# Altium PCB DB10005_BMS.PcbDoc
Units mm, origin at the board's own origin, x right, y up, seen from the top; angles counter-clockwise.
Board outline 140.01 x 60 mm, 4 copper layers (L1, L2, L3, L4), stack 1.446 mm thick; 56 components, 94 nets, 432 pads, 0 vias.
Unrouted connection lines stored in the file: 218.
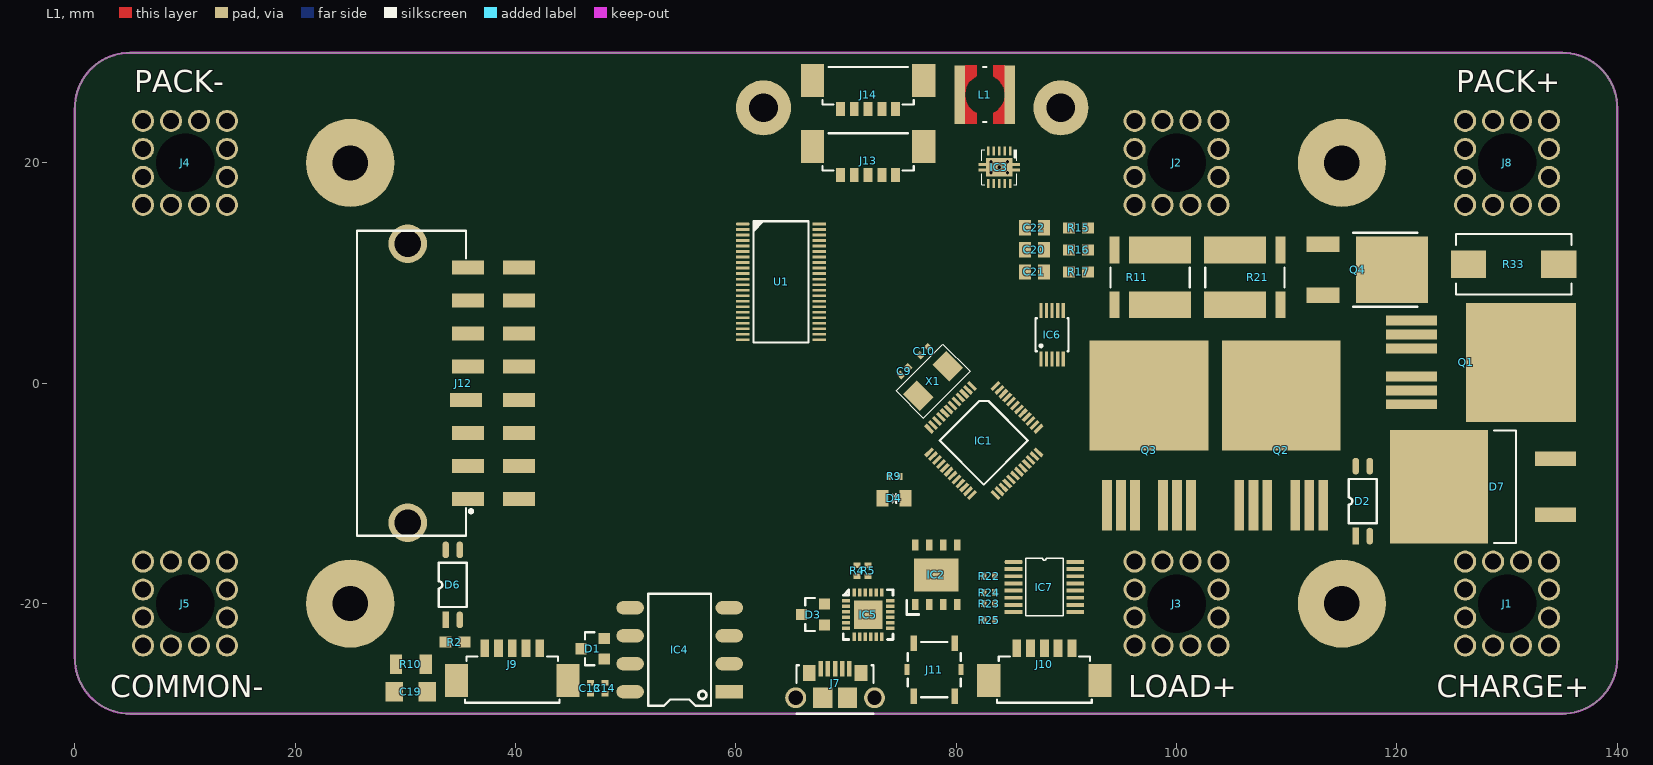
[diagram p0: L1 view]
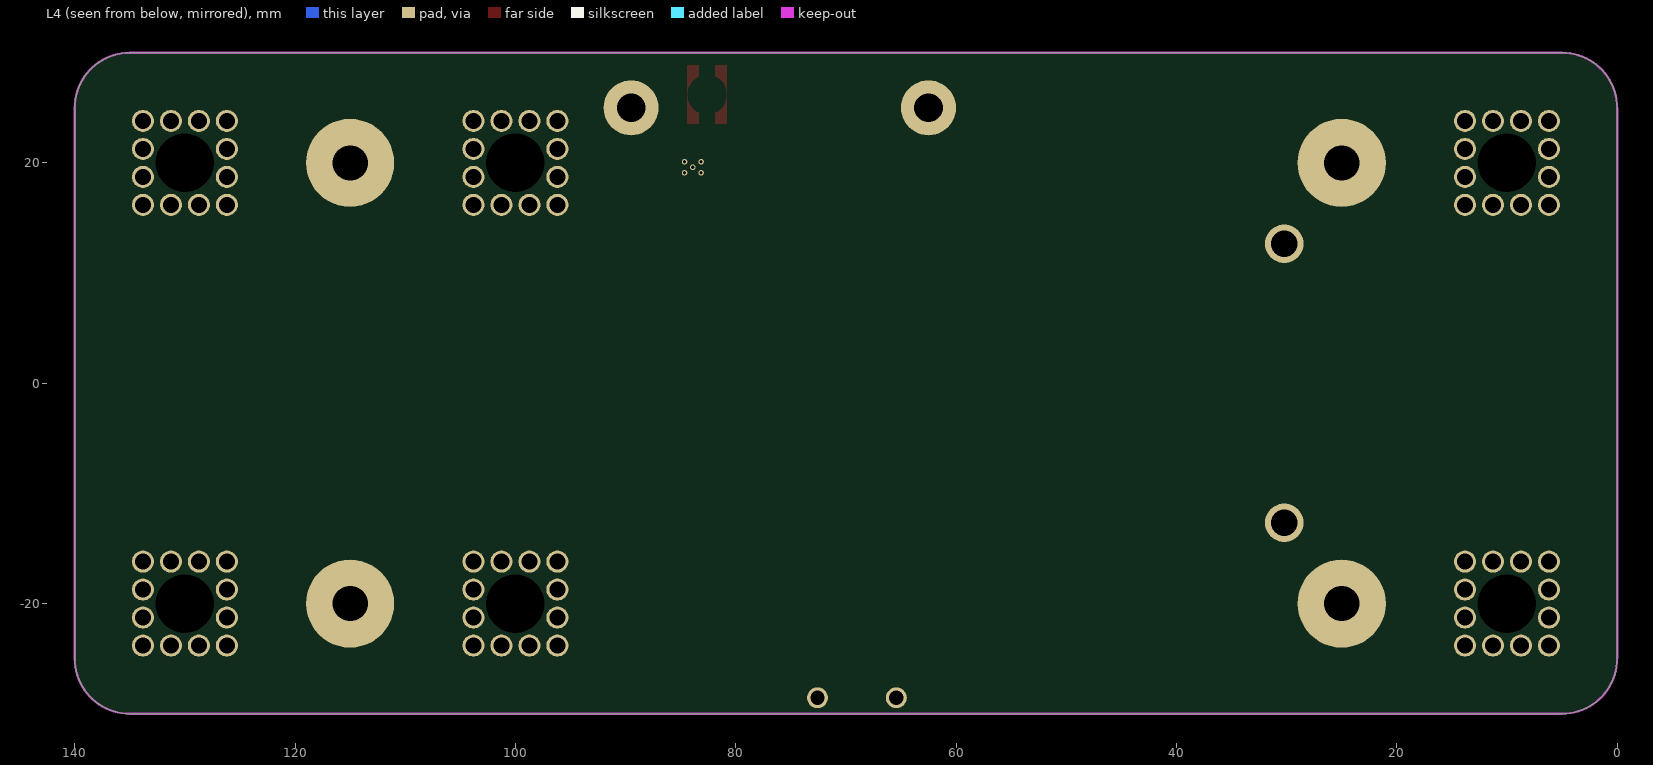
[diagram p1: L4 view, seen from below]

## Layer stack, top to bottom
Top Solder: solder mask 0.05, Solder Resist, Dk 3.5
L1: signal copper 0.035
Dielectric 1: prepreg 0.288, FR-4, Dk 4.2
L2: signal copper 0.035
Dielectric 3: core 0.73, FR-4, Dk 4.2
L3: signal copper 0.035
Dielectric 2: prepreg 0.288, FR-4, Dk 4.2
L4: signal copper 0.035
Bottom Solder: solder mask 0.05, Solder Resist, Dk 3.5

## Board outline
0,-25 ccw(c5,-25) 5,-30 135,-30 ccw(c135,-25) 140,-25 140,25 ccw(c135,25) 135,30 5,30 ccw(c5,25) 0,25 -0.014,24.986

## Design rules (kind name [scope] priority, off if disabled: settings)
Clearance [All] p1: gap=0.254
PolygonConnect [All] p1: connectstyle=Relief reliefconductorwidth=0.254 reliefentries=4 polygonreliefangle="90 Angle" airgapwidth=0.254
RoutingVias [All] p1: holewidth=0.711 width=1.27 viastyle="Through Hole" minholewidth=0.711 minwidth=1.27 maxholewidth=0.711 maxwidth=1.27
SolderMaskExpansion [All] p1: expansion=0.102
Width [All] p1: maxlimit=0.254 minlimit=0.254 preferedwidth=0.254
30 further rules are at their usual default settings.

## Classes and differential pairs
component class "Battery stack monitor": U1
component class "USB - Serial": D3 IC5 R4 R5
component class PowerSwitch: C20 C21 C22 D2 D7 IC6 IC7 Q1 Q2 Q3 Q4 R11 R15 R16 R17 R21 R22 R23 R24 R25 R33
component class "Power management": IC3 L1
component class DB10005_TopLevel: D4 J1 J2 J3 J4 J5 J7 J8 J9 J10 J11 J12 J13 J14 R9
component class Controller: C9 C10 IC1 IC2 X1
component class CAN: C13 C14 C19 D1 D6 IC4 R2 R10

## Components (designator, comment, footprint, x,y, rotation, side; value= is the part's Value field where it differs from the comment)
C9 "18pF" C0402 75.3,1.1 r225 top
C10 "18pF" C0402 77.1,2.9 r45 top
C13 "1uF" C0402 46.8,-27.7 r270 top
C14 "100nF" C0402 48.099,-27.7 r270 top
C19 "10nF" C-1206 30.5,-28 r0 top
C20 "100nF" C-0805 87.1,12.1 r0 top
C21 "100nF" C-0805 87.1,10.1 r0 top
C22 "100nF" C-0805 87.1,14.1 r0 top
D1 "ESDA6V1L" SOT23 47,-24.1 r90 top
D2 "HMHA2801" FSOP4 116.9,-10.7 r90 top
D3 "SP0502BAHTG" SOT23 67,-21 r90 top
D4 "Green" D-0805 74.352,-10.45 r0 top
D6 "HMHA2801" FSOP4 34.3,-18.3 r90 top
D7 "STPS41H100CG" D2-PAK 127.8,-9.4 r90 top
IC1 "STM32F303CCT6" LQFP48 82.5,-5.2 r315 top
IC2 "M25P16" VFQFPN 78.2,-17.4 r0 top
IC3 "LM5165YDRCT" PWSON10 83.9,19.6 r180 top
IC4 "ISO1050DUBR" PDSO8 59.4,-28 r180 top
IC5 "CP2104-F03-GM" QFN24 72,-21 r0 top
IC6 "ISL28022" MSOP10 88.7,4.4 r90 top
IC7 "BQ76200PW" TSSOP16 88,-18.5 r0 top
J1 "M5 Bush" "7460408_HAL Surface" 130,-20 r0 top
J2 "M5 Bush" "7460408_HAL Surface" 100,20 r0 top
J3 "M5 Bush" "7460408_HAL Surface" 100,-20 r0 top
J4 "M5 Bush" "7460408_HAL Surface" 10,20 r0 top
J5 "M5 Bush" "7460408_HAL Surface" 10,-20 r0 top
J7 "USB3075" "USB3075 - NOSLOT" 69,-30 r0 top
J8 "M5 Bush" "7460408_HAL Surface" 130,20 r0 top
J9 "53261-0571" 53261-0571 39.7,-27 r0 top
J10 "53261-0571" 53261-0571 88,-27 r0 top
J11 "EVQPLMA15" EVQPLM 78,-26 r180 top
J12 "662016230822" 662016230822 38,0 r270 top
J13 "53398-0571" 53398-0571 72,21.5 r180 top
J14 "53398-0571" 53398-0571 72,27.5 r180 top
L1 "150uH 0.42A" "WE-TPC 4828, MH" 82.6,26.2 r180 top
Q1 "IRF2907ZS" D2PAK7 127.5,1.9 r270 top
Q2 "IRF2907ZS" D2PAK7 109.5,-4.9 r0 top
Q3 "IRF2907ZS" D2PAK7 97.5,-4.9 r0 top
Q4 "IRFR6215" D-PAK 113.3,12.6 r270 top
R2 "2.2K" 0603 34.5,-23.5 r0 top
R4 "240" 0402 71,-17 r270 top
R5 "240" 0402 72,-17 r270 top
R9 "470" 0402 74.352,-8.45 r0 top
R10 "1M" 1206 30.5,-25.5 r0 top
R11 "0.5mOhm" WSLP2726 97.6,9.6 r180 top
R15 "10R" 0603 91.1,14.1 r0 top
R16 "10R" 0603 91.1,12.1 r0 top
R17 "10R" 0603 91.1,10.1 r0 top
R21 "0.5mOhm" WSLP2726 106.2,9.6 r0 top
R22 "10k" 0402 83,-17.5 r0 top
R23 "10k" 0402 83,-20 r0 top
R24 "10k" 0402 83,-19 r0 top
R25 "10k" 0402 83,-21.5 r0 top
R33 "18R" SM_3 130.6,10.8 r0 top
U1 "LTC6802-1" SSOP44 64.1,9.2 r0 top
X1 "8MHz" XTAL150SMD_125X196 77.9,0.2 r45 top

## Footprints (in the part's own frame and the unit in brackets; to place one, negate y for a bottom-side part, rotate by r counter-clockwise, add the part's x,y. Pads: shape width x height; smd on the part's side, far side on the other; paste and mask are expansions set on the pad)
0402 [mm]
  rect 0.5x0.635 smd: 1(-0.5,0) 2(0.5,0)
  body extent -0.5,-0.25 0.5,0.25, height 0.25
0603 [mm]
  rect 1.1x1 smd: 1(-0.85,0) 2(0.85,0)
  body extent -0.95,-0.45 0.95,0.45, height 0.45
1206 [mm]
  rect 1.1x1.8 smd: 1(-1.35,0) 2(1.35,0)
  body extent -1.55,-0.78 1.55,0.78, height 0.6
53261-0571 [mm]
  rect 2.1x3 smd: 0(-5.05,0) 0(5.05,0)
  rect 0.8x1.6 smd: 1(-2.5,2.95) 2(-1.25,2.95) 3(0,2.95) 4(1.25,2.95) 5(2.5,2.95)
  silkscreen extent -4.3,-2 4.3,2.2, body extent -5.7,-2 5.7,3.2, height 3.41
53398-0571 [mm]
  rect 2.1x3 smd: 0(-5.05,0) 0(5.05,0)
  rect 0.8x1.3 smd: 1(-2.5,2.6) 2(-1.25,2.6) 3(0,2.6) 4(1.25,2.6) 5(2.5,2.6)
  silkscreen extent -4.15,-1.2 4.15,2.2, body extent -5.7,-1.15 5.7,3.05, height 4.71
"7460408_HAL Surface" [mm] "M5, thr 6mm"
  round 2 hole 1.45: 1(-3.81,-3.81) 1(-3.81,-1.27) 1(-3.81,1.27) 1(-3.81,3.81) 1(-1.27,-3.81) 1(-1.27,3.81) 1(1.27,-3.81) 1(1.27,3.81) 1(3.81,-3.81) 1(3.81,-1.27) 1(3.81,1.27) 1(3.81,3.81)
  round 0 hole 5.3 unplated: ""(0,0)
  body extent -4.5,-4.5 4.5,4.5, height 6
662016230822 [mm] "Dual row SMT Right angle header With TH Metal Clip 16p"
  rect 1.27x2.92 smd: 1(10.5,-2.31) 2(7.5,-2.31) 3(4.5,-2.31) 4(1.5,-2.49) 5(-1.5,-2.31) 6(-4.5,-2.31) 7(-7.5,-2.31) 8(-10.5,-2.31) 9(10.5,2.31) 10(7.5,2.31) 11(4.5,2.31) 12(1.5,2.31) 13(-1.5,2.31) 14(-4.5,2.31) 15(-7.5,2.31) 16(-10.5,2.31)
  round 3.5 hole 2.41: ""(-12.66,-7.79) ""(12.66,-7.79)
  silkscreen extent -13.85,-12.39 13.85,-1.9, body extent -13.85,-12.39 13.85,3.51, height 8.83
C0402 [mm]
  rect 0.5x0.635 smd: 1(-0.5,0) 2(0.5,0)
  body extent -0.5,-0.25 0.5,0.25, height 0.5
C-0805 [mm]
  rect 1.1x1.4 smd: 1(-0.875,0) 2(0.875,0)
  body extent -1.01,-0.64 1.01,0.64, height 0.6
C-1206 [mm]
  rect 1.6x1.8 smd: 1(-1.5,0) 2(1.5,0)
  body extent -1.61,-0.81 1.61,0.81, height 0.45
D2-PAK [mm]
  rect 1.3x3.7 smd: A1(-2.54,-6.6) A2(2.54,-6.6)
  rect 10.3x8.9 smd: K(0,4)
  silkscreen extent -5.1,-3 5.1,-1, body extent -5.08,-7.82 5.08,7.45, height 4.88
D2PAK7 [mm]
  rect 10.8x10 smd: D(0,3.775)
  rect 0.9x4.6 smd: G(-3.81,-6.175) S(-2.537,-6.175) S(-1.27,-6.175) S(1.27,-6.175) S(2.54,-6.175) S(3.81,-6.175)
  body extent -5,-7.8 5,7.87, height 4.81
D-0805 [mm]
  rect 1.1x1.5 smd: A(-1.05,0) K(1.05,0)
  silkscreen extent -0.15,-0.4 0.2,0.4, body extent -1.01,-0.64 1.01,0.64, height 0.6
D-PAK [mm]
  rect 6x6.5 smd: D(2.3,6.25)
  rect 1.4x3 smd: G(0,0) S(4.6,0)
  silkscreen extent -1.06,2.74 5.67,8.54, body extent -0.99,-0.75 5.59,8.95, height 2.47
EVQPLM [mm] "Tactile switch"
  rect 0.45x1 smd: 0(-2.45,0) 0(2.45,0)
  rect 0.6x1.4 smd: 1(-1.85,2.4) 1(-1.85,-2.4) 2(1.85,2.4) 2(1.85,-2.4)
  silkscreen extent -2.4,-2.5 2.4,2.5, body extent -2.45,-2.5 2.45,2.5, height 1.5
FSOP4 [mm]
  rect 1.52x0.61 smd: 1(-3.175,0.635)
  oval 1.52x0.61 smd: 2(-3.175,-0.635) 3(3.175,-0.635) 4(3.175,0.635)
  silkscreen extent -2,-1.27 2,1.27, body extent -3.5,-1.4 3.5,1.4, height 2.1
LQFP48 [mm]
  rect 1x0.32 smd: 1(-4.26,2.75) 2(-4.26,2.25) 3(-4.26,1.75) 4(-4.26,1.25) 5(-4.26,0.75) 6(-4.26,0.25) 7(-4.26,-0.25) 8(-4.26,-0.75) 9(-4.26,-1.25) 10(-4.26,-1.75) 11(-4.26,-2.25) 12(-4.26,-2.75) 25(4.26,-2.75) 26(4.26,-2.25) 27(4.26,-1.75) 28(4.26,-1.25) 29(4.26,-0.75) 30(4.26,-0.25) 31(4.26,0.25) 32(4.26,0.75) 33(4.26,1.25) 34(4.26,1.75) 35(4.26,2.25) 36(4.26,2.75)
  rect 0.32x1 smd: 13(-2.75,-4.26) 14(-2.25,-4.26) 15(-1.75,-4.26) 16(-1.25,-4.26) 17(-0.75,-4.26) 18(-0.25,-4.26) 19(0.25,-4.26) 20(0.75,-4.26) 21(1.25,-4.26) 22(1.75,-4.26) 23(2.25,-4.26) 24(2.75,-4.26) 37(2.75,4.26) 38(2.25,4.26) 39(1.75,4.26) 40(1.25,4.26) 41(0.75,4.26) 42(0.25,4.26) 43(-0.25,4.26) 44(-0.75,4.26) 45(-1.25,4.26) 46(-1.75,4.26) 47(-2.25,4.26) 48(-2.75,4.26)
  silkscreen extent -2.83,-2.83 2.83,2.83, body extent -4.5,-4.5 4.5,4.5, height 1.52
MSOP10 [mm] "Mini small outline package"
  rect 1.4x0.3 smd: 1(-2.2,1) 2(-2.2,0.5) 3(-2.2,0) 4(-2.2,-0.5) 5(-2.2,-1) 6(2.2,-1) 7(2.2,-0.5) 8(2.2,0) 9(2.2,0.5) 10(2.2,1)
  silkscreen extent -1.5,-1.5 1.5,1.5, body extent -2.45,-1.5 2.45,1.5, height 1.15
PDSO8 [mm]
  rect 2.5x1.2 smd: 1(0,0)
  oval 2.5x1.2 smd: 2(0,-2.54) 3(0,-5.08) 4(0,-7.62) 5(9,-7.62) 6(9,-5.08) 7(9,-2.54) 8(9,0)
  silkscreen extent 1.65,-8.89 7.35,1.27, body extent -0.45,-8.7 9.45,1.2, height 4.33
PWSON10 [mm]
  rrect40% 0.23x0.8 smd: 1(-1,-1.475) 2(-0.5,-1.475) 3(0,-1.475) 4(0.5,-1.475) 5(1,-1.475) 6(1,1.475) 7(0.5,1.475) 8(0,1.475) 9(-0.5,1.475) 10(-1,1.475)
  rrect40% 1.05x0.68 on Top Paste: 2(-0.575,0.4) 2(-0.575,-0.4) 2(0.575,0.4) 2(0.575,-0.4)
  rrect10% 0.5x0.26 on Top Paste: 3(-1.55,0.25) 3(1.55,0.25) 4(-1.55,-0.25) 4(1.55,-0.25)
  rect 0.7x0.28 smd paste-2: CP(-1.55,-0.25) CP(-1.55,0.25) CP(1.55,-0.25) CP(1.55,0.25)
  round 0.5 hole 0.3 unplated mask+0.102: CP(-0.75,0.5) CP(-0.75,-0.5) CP(0,0) CP(0.75,0.5) CP(0.75,-0.5)
  rect 2.4x1.65 smd paste-2: CP(0,0)
  silkscreen extent -1.6,-1.6 1.6,1.6, body extent -1.6,-1.6 1.6,1.6, height 0.6
QFN24 [mm]
  rect 2.6x2.6 smd paste-10: 0(0,0)
  rect 0.75x0.3 smd: 1(-2,1.25) 2(-2,0.75) 3(-2,0.25) 4(-2,-0.25) 5(-2,-0.75) 6(-2,-1.25) 13(2,-1.25) 14(2,-0.75) 15(2,-0.25) 16(2,0.25) 17(2,0.75) 18(2,1.25)
  rect 0.3x0.75 smd: 7(-1.25,-2) 8(-0.75,-2) 9(-0.25,-2) 10(0.25,-2) 11(0.75,-2) 12(1.25,-2) 19(1.25,2) 20(0.75,2) 21(0.25,2) 22(-0.25,2) 23(-0.75,2) 24(-1.25,2)
  silkscreen extent -2.25,-2.25 2.25,2.25, body extent -2.01,-2.01 2.01,2.01, height 0.9
SM_3 [mm]
  rect 3.2x2.5 smd: 1(-4.1,0) 2(4.1,0)
  silkscreen extent -5.25,-2.75 5.25,2.75, body extent -5.4,-2.75 5.4,2.75, height 5.05
SOT23 [mm]
  rect 1x1 smd: A(0,1.05) K1(-0.95,-1.05) K2(0.95,-1.05)
  silkscreen extent -1.5,-0.15 1.5,0.7, body extent -1.5,-1.29 1.5,1.35, height 1.08
SSOP44 [mm]
  oval 1.25x0.25 smd: 1(-3.475,5.25)
  rect 1.25x0.25 smd: 2(-3.475,4.75) 3(-3.475,4.25) 4(-3.475,3.75) 5(-3.475,3.25) 6(-3.475,2.75) 7(-3.475,2.25) 8(-3.475,1.75) 9(-3.475,1.25) 10(-3.475,0.75) 11(-3.475,0.25) 12(-3.475,-0.25) 13(-3.475,-0.75) 14(-3.475,-1.25) 15(-3.475,-1.75) 16(-3.475,-2.25) 17(-3.475,-2.75) 18(-3.475,-3.25) 19(-3.475,-3.75) 20(-3.475,-4.25) 21(-3.475,-4.75) 22(-3.475,-5.25) 23(3.475,-5.25) 24(3.475,-4.75) 25(3.475,-4.25) 26(3.475,-3.75) 27(3.475,-3.25) 28(3.475,-2.75) 29(3.475,-2.25) 30(3.475,-1.75) 31(3.475,-1.25) 32(3.475,-0.75) 33(3.475,-0.25) 34(3.475,0.25) 35(3.475,0.75) 36(3.475,1.25) 37(3.475,1.75) 38(3.475,2.25) 39(3.475,2.75) 40(3.475,3.25) 41(3.475,3.75) 42(3.475,4.25) 43(3.475,4.75) 44(3.475,5.25)
  silkscreen extent -2.5,-5.5 2.5,5.5, body extent -3.76,-5.6 3.76,5.6, height 1.09
TSSOP16 [mm]
  rrect50% 1.6x0.35 smd: 1(-2.8,2.275)
  rect 1.6x0.35 smd: 2(-2.8,1.625) 3(-2.8,0.975) 4(-2.8,0.325) 5(-2.8,-0.325) 6(-2.8,-0.975) 7(-2.8,-1.625) 8(-2.8,-2.275) 9(2.8,-2.275) 10(2.8,-1.625) 11(2.8,-0.975) 12(2.8,-0.325) 13(2.8,0.325) 14(2.8,0.975) 15(2.8,1.625) 16(2.8,2.275)
  silkscreen extent -1.7,-2.6 1.7,2.6, body extent -3.14,-2.5 3.14,2.5, height 1.09
"USB3075 - NOSLOT" [mm]
  round 1.9 hole 1.3: 0(-3.575,1.45) 0(3.575,1.45)
  rect 1.15x1.45 smd: 0(-2.35,3.68) 0(2.35,3.68)
  rect 1.75x1.9 smd: 0(-1.125,1.45) 0(1.125,1.45)
  rect 0.4x1.4 smd: 1(-1.3,4.1) 2(-0.65,4.1) 3(0,4.1) 4(0.65,4.1) 5(1.3,4.1)
  silkscreen extent -3.5,0 3.5,4.4, body extent -3.89,-1.2 3.89,4.29, height 2.59
VFQFPN [mm]
  rect 4.04x2.99 smd paste-10: 0(0,0)
  rect 0.6x1 smd: 1(-1.905,-2.7) 2(-0.635,-2.7) 3(0.635,-2.7) 4(1.905,-2.7) 5(1.905,2.7) 6(0.635,2.7) 7(-0.635,2.7) 8(-1.905,2.7)
  silkscreen extent -2.7,-3.6 -1.6,-2.3, body extent -2.5,-3 2.5,3, height 0.85
"WE-TPC 4828, MH" [mm] "SMD Inductor, 2-Leads, Body 4,8x4,8mm"
  rect 0.95x5.3 smd: 1(-2.275,0) 2(2.275,0)
  L1 region: -1.8,-2.65 -0.75,-2.65 -0.75,-1.65 -1,-1.5 -1.2,-1.35 -1.35,-1.2 -1.5,-1 -1.65,-0.7 -1.7,-0.6 -1.75,-0.4 -1.8,0
  L1 region: 1.8,-2.65 0.75,-2.65 0.75,-1.65 1,-1.5 1.2,-1.35 1.45,-1.1 1.55,-0.95 1.7,-0.65 1.75,-0.45 1.8,0
  L1 region: 1.8,2.65 0.75,2.65 0.75,1.65 0.95,1.55 1.1,1.45 1.45,1.1 1.6,0.85 1.65,0.75 1.75,0.45 1.8,0
  L1 region: -1.8,2.65 -0.75,2.65 -0.75,1.65 -0.85,1.6 -1.1,1.45 -1.4,1.15 -1.55,0.95 -1.7,0.65 -1.75,0.45 -1.8,0
  silkscreen extent -0.15,-2.5 0.15,2.5, body extent -2.4,-2.4 2.4,2.4, height 2.79
WSLP2726 [mm] "Shunt resistor"
  rect 5.6x2.44 smd: I1(-0.89,-2.48) I2(-0.89,2.48)
  rect 0.89x2.44 smd: U1(3.245,-2.48) U2(3.245,2.48)
  silkscreen extent -3.6,-0.9 3.6,0.9, body extent -3,-3.45 3.6,3.45, height 2.96
XTAL150SMD_125X196 [mil] "XTAL150SMD_125X196"
  rect 70x85 smd mask+2: 1(-74.8,0) 2(74.8,0)
  silkscreen extent -118,-69 118,69, body extent -120,-69 120,69, height 57

## Part data
C9 C10: library part 18pF/0402/CER/50V, "Capacitor, 18pF, 50V, NP0"
C13: library part 1uF/0402/CER/6.3V, "Capacitor, 1uF, 6.3V, X5R"
C14: library part 100nF/0402/CER/25V, "Capacitor, 100nF, 25V, X7R"
C19: library part 10nF/1206/CER/1kV, "Capacitor, F, 1kV, X7R"
C20 C21 C22: library part 100nF/0805/CER/100V, "Capacitor, 100nF, 100V, X7R"
D1: "Diode TVS Dual, Vrwm: 5.25V, Vbr: 7.2V, Vc: 12.45V, Ippm: 15A"
D2 D6: "Optocoupler, Vout:80V, Iin:0.01A"
D3: "Diode TVS Dual, Vrwm: 5.5V Vc: 8V"
D4: library part SML-210PTT86L, "Led, Green, Li:4mcd, Vf:2.2V, If:0.02A"
D7: "100 V, 40 A, TO-263, 3 Pins, 900 mV"
IC1: "MCU, 32BIT CORTEX-M3, 72MHz"
IC2: library part M25P16-VMP6G, "FLASH, SERIAL, 16MB"
IC3: library part LM5165Y, "Buck Vreg 150mA 3V3 out 5-65Vin"
IC4: "CAN TRANSCEIVER"
IC5: "USB to UART converter"
IC6: "Current and voltage ADC"
IC7: "Battery protector, Lead Acid"
J1 J2 J3 J4 J5 J8: library part 7460408, "Bush with Circumference M5"
J7: "USB 2.0 MICRO B, RCPT, 5POS, SMT"
J9 J10: "PicoBlade 53261 Series, 5Pin, Right Angle"
J11: "SWITCH, TACT, 4.9MM, SMD, 2.6N"
J12: "WR-MPC3 Series, Surface Mount, Header, 16 Contacts, 3 mm"
J13 J14: "PicoBlade 53398 Series, 5Pin, Right Angle"
L1: library part 744043151, "150UH, 30%, 0.42A"
Q1 Q2 Q3: library part IRF2907ZS-7PPBF, "Mosfet, N-channel, Vds:75V, Id:180A, Vgs-th:4V, Rds-on:0.0038ohm"
Q4: library part IRFR6215TRPBF, "Mosfet, P-channel, Vds:150V, Id:13A, Vgs-th:4V, Rds-on:0.295ohm"
R2: library part 2.2K/0603/0063W/50V, "Resistor, 2.2K, 1%, 0.063W, 50V, 100PPM, 0603"
R4 R5: library part 240/0402/0063W/50V, "Resistor, 240, 0.1%, 0.0625W, 50V, 100PPM, 0402"
R9: library part 470/0402/0063W/50V, "Resistor, 470, 1%, 0.0625W, 50V, 100PPM, 0402"
R10: library part 1M/1206/0300W/1kV, "Resistor, 1M, 1%, 0.25W, 1kV, 200PPM, 1206"
R11 R21: library part WSLP2726L5000FEA, "0.5mohm, 7 W, ± 1%, 2726"
R15 R16 R17: library part 10/0603/0063W/50V, "Resistor, 10R, 1%, 0.063W, 50V, 200PPM, 0603"
R22 R23 R24 R25: library part 10k/0402/0063W/50V, "Resistor, 10k, 0.1%, 0.0625W, 50V, 100PPM, 0402"
R33: library part 18, "Resistor Wirewound, 18R, 5%, 1W, 500V, 200PPM, SMW"
U1: library part LTC6802IG-1, "Multicell Battery Stack Monitor, T:-40°C to +85°C"
X1: library part 7A-8.000MAAJ-T, "8MHZ, 18PF, 5 X 3.2MM"

## Free pads (board coordinates)
  round 8 hole 3.2 unplated: 1(25,20) 2(25,-20) 3(115,20) 5(115,-20)
  round 5 hole 2.6 unplated: 6(62.5,25) 7(89.5,25)

## Nets (pads, with @x,y where several pads share a name; then routed paths per layer and width w, separated by ;. In a path a pad name is that pad's centre, name@x,y a point inside that pad or via, vN(x,y) a via of type N, cw(c..) or ccw(c..) an arc to the next point about the centre after c; other vN are vias at no path point)
3V3: IC1.9 IC1.24 IC1.36 IC1.48 IC2.3 IC2.7 IC2.8 IC4.1 J10.1 J11.2 J13.1 J14.1
5V_CAN: C13.2 C14.2 IC4.8 J9.2
+3V3: IC6.6
BATT+: J2.1 R11.I1 R15.2 R21.I2
CANH: D1.K1 IC4.7 J9.3
CANL: D1.K2 IC4.6 J9.4
ENABLE_CAN: J9.1 R2.2
GND: C9.1 C10.1 C19.1 C20.1 C21.1 C22.1 D3.A D4.K D6.3 IC1.8 IC1.23 IC1.35 IC1.47 IC2.0 IC2.4 IC3.3@83.9,21.075 IC3.10 IC3.CP IC4.4 IC5.0 IC5.2 IC6.1 IC6.2 IC6.7 IC7.9 J4.1 J5.1 J7.0 J7.5 J10.0 J10.5 J11.0 J13.0 J13.5 J14.0 J14.5 pad.6 R10.1
GND_CAN: C13.1 C14.1 C19.2 D1.A D6.2 IC4.5 J9.0 J9.5 R10.2
LED: J14.4
NetC9_2: C9.2 IC1.6 X1.1
NetC10_2: C10.2 IC1.5 X1.2
NetC16_2: IC5.16
NetC17_2: IC5.7 IC5.8 J7.1
NetC20_2: C20.2 IC6.10 R16.1
NetC21_2: C21.2 IC6.9 pad.7 R17.1
NetC22_2: C22.2 IC6.8 R15.1
NetC23_2: IC7.2
NetC24_2: IC7.11
NetD2_1: D2.1
NetD2_2: D2.2 D2.4 Q1.S Q2.D Q3.D Q4.S R11.I2 R21.I1
NetD2_3: D2.3 IC1.10
NetD3_K1: D3.K1 IC5.4 J7.2
NetD3_K2: D3.K2 IC5.3 J7.3
NetD4_A: D4.A R9.1
NetD6_1: D6.1 R2.1
NetD6_4: D6.4 IC1.38
NetD7_A1: D7.A1 D7.A2 Q1.D
NetD7_K: D7.K J1.1
NetIC1_2: IC1.2 R22.1
NetIC1_3: IC1.3 R25.1
NetIC1_4: IC1.4 R24.1
NetIC1_11: IC1.11
NetIC1_12: IC1.12 R5.1
NetIC1_13: IC1.13 R4.1
NetIC1_14: IC1.14
NetIC1_15: IC1.15
NetIC1_16: IC1.16
NetIC1_17: IC1.17
NetIC1_19: IC1.19 R9.2
NetIC1_29: IC1.29 IC6.3
NetIC1_30: IC1.30 IC6.5
NetIC1_31: IC1.31 IC6.4
NetIC1_32: IC1.32 IC4.2
NetIC1_33: IC1.33 IC4.3
NetIC1_34: IC1.34 J10.2
NetIC1_37: IC1.37 J10.3
NetIC1_39: IC1.39
NetIC1_40: IC1.40
NetIC1_41: IC1.41
NetIC1_42: IC1.42 J13.3
NetIC1_43: IC1.43 J13.2
NetIC1_44: IC1.44 J11.1
NetIC1_45: IC1.45 J13.4
NetIC1_46: IC1.46 R23.1
NetIC5_9: IC5.9
NetIC5_20: IC5.20 R5.2
NetIC5_21: IC5.21 R4.2
NetIC7_4: IC7.4 R22.2
NetIC7_5: IC7.5 IC7.7 R23.2
NetIC7_6: IC7.6 R24.2
NetIC7_8: IC7.8 R25.2
NetIC7_12: IC7.12
NetIC7_14: IC7.14
NetIC7_16: IC7.16
NetJ3_1: J3.1 Q2.S Q3.S R33.2
NetJ12_1: J12.1
NetJ12_2: J12.2
NetJ12_3: J12.3
NetJ12_4: J12.4
NetJ12_5: J12.5
NetJ12_6: J12.6
NetJ12_7: J12.7
NetJ12_8: J12.8
NetJ12_9: J12.9
NetJ12_10: J12.10
NetJ12_11: J12.11
NetJ12_12: J12.12
NetJ12_13: J12.13 J12.15
NetJ12_14: J12.14
NetJ12_16: J12.16
NetQ1_G: Q1.G
NetQ2_G: Q2.G Q3.G
NetQ4_D: Q4.D R33.1
NetQ4_G: Q4.G
NetR11_U1: R11.U1 R16.2 R21.U2
NetR11_U2: R11.U2 R17.2 R21.U1
PUSHBUTTON: J14.3
R\S\T\: IC1.7 J10.4
SPI2_MISO: IC1.27 IC2.2
SPI2_MOSI: IC1.28 IC2.5
SPI2_SCK: IC1.26 IC2.6
SPI2_SS: IC1.25 IC2.1
VDD_CP: IC5.5 IC5.6
pads on no net: IC1.1 IC1.18 IC1.20 IC1.21 IC1.22 IC3.1 IC3.2 IC3.3@82.35,19.35 IC3.3@85.45,19.35 IC3.4 IC3.5 IC3.6 IC3.7 IC3.8 IC3.9 IC5.1 IC5.10 IC5.11 IC5.12 IC5.13 IC5.14 IC5.15 IC5.17 IC5.18 IC5.19 IC5.22 IC5.23 IC5.24 IC7.1 IC7.3 IC7.10 IC7.13 IC7.15 J1. J2. J3. J4. J5. J7.4 J8. J8.1 J12. J14.2 L1.1 L1.2 U1.1 U1.2 U1.3 U1.4 U1.5 U1.6 U1.7 U1.8 U1.9 U1.10 U1.11 U1.12 U1.13 U1.14 U1.15 U1.16 U1.17 U1.18 U1.19 U1.20 U1.21 U1.22 U1.23 U1.24 U1.25 U1.26 U1.27 U1.28 U1.29 U1.30 U1.31 U1.32 U1.33 U1.34 U1.35 U1.36 U1.37 U1.38 U1.39 U1.40 U1.41 U1.42 U1.43 U1.44

## Keep-outs
Keep-Out Layer:
  lines w0.2: -0.014,-24.986 -0.014,24.986 ; 0,-25 ccw(c5,-25) 5,-30 135,-30 ccw(c135,-25) 140,-25 140,25 ccw(c135,25) 135,30 5,30 ccw(c5,25) 0,25

## Silkscreen, mask and mechanical layers (free items; w line width, h text height)
Top Overlay:
  text "PACK-" at 5.4,26.4 h2
  text "PACK+" at 125.4,26.4 h2
  text "COMMON-" at 3.2,-28.5 h2
  text "LOAD+" at 95.6,-28.5 h2
  text "CHARGE+" at 123.6,-28.5 h2

## Text inside footprints (layer, text, board x,y; h text height)
J1: Mechanical 7 "Sn 15um max." at 127.7,-25.5 h0.8; Mechanical 7 "Copper 25um-60um" at 126.7,-26.2 h0.8
J2: Mechanical 7 "Sn 15um max." at 97.7,14.5 h0.8; Mechanical 7 "Copper 25um-60um" at 96.7,13.8 h0.8
J3: Mechanical 7 "Sn 15um max." at 97.7,-25.5 h0.8; Mechanical 7 "Copper 25um-60um" at 96.7,-26.2 h0.8
J4: Mechanical 7 "Sn 15um max." at 7.7,14.5 h0.8; Mechanical 7 "Copper 25um-60um" at 6.7,13.8 h0.8
J5: Mechanical 7 "Sn 15um max." at 7.7,-25.5 h0.8; Mechanical 7 "Copper 25um-60um" at 6.7,-26.2 h0.8
J8: Mechanical 7 "Sn 15um max." at 127.7,14.5 h0.8; Mechanical 7 "Copper 25um-60um" at 126.7,13.8 h0.8